# EAGLE board uduino (EAGLE 4.16)
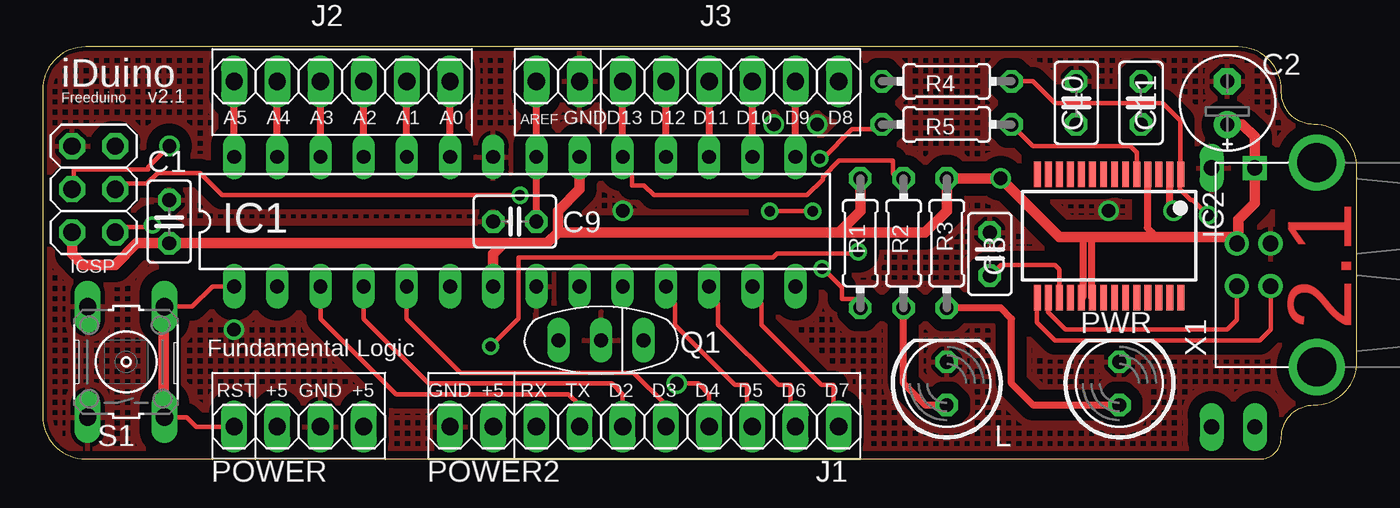
[diagram p0: board, top side]
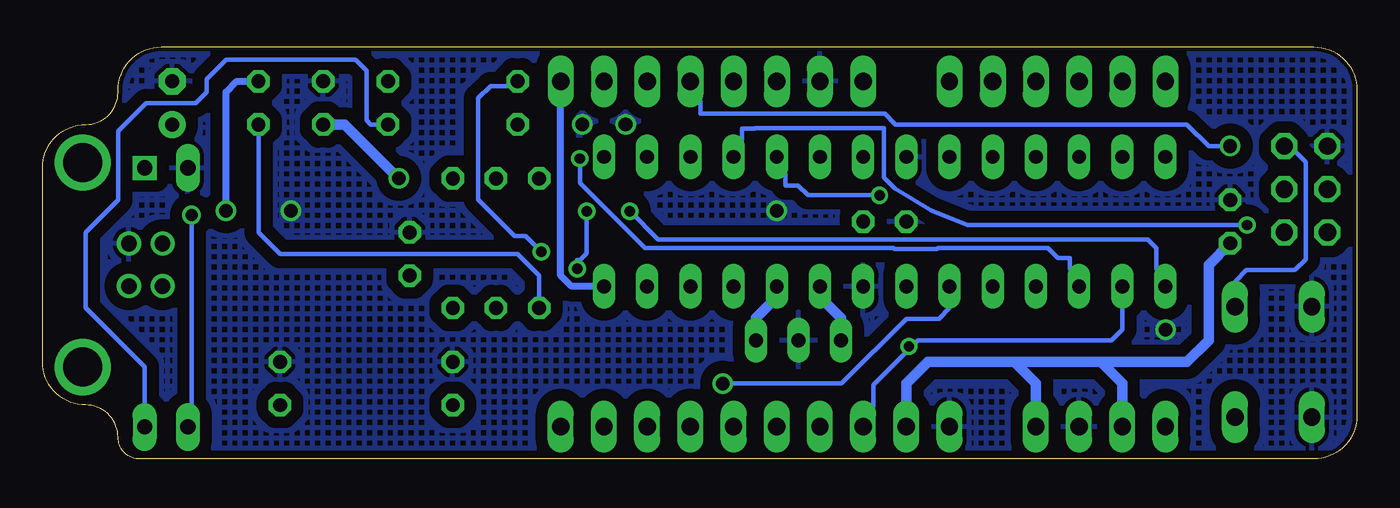
[diagram p1: board, bottom side, seen from below]

Size 77.3 x 24.25 mm. Coordinates in mm from the lower left corner, seen from the top.
Outline: 0,2.54 arc90 2.54,0 71.59,0 arc90 72.86,1.27 arc-90 74.77,3.17 arc90 77.3,5.71 77.3,17.14 arc90 74.77,19.68 arc-90 72.86,21.59 72.86,21.71 arc90 70.32,24.25 2.54,24.25 arc90 0,21.71 0,2.54
Copper layers (1*16): Top 0.035mm / dielectric 1.5mm / Bottom 0.035mm
Design rules "default": minimum track width 10mil, minimum drill 24mil, track to track 8mil, track to pad 8mil, pad to pad 8mil, via to via 8mil, smd to smd 8mil, copper to edge 10mil, drill to drill 10mil, minimum pad ring 10mil, minimum via ring 8mil, stop-mask expansion 4mil, vias tented up to drill 0mil, thermal gap 10mil
Net classes: 0 default: drill 0.203 mm; 1 power: width 0.61 mm, drill 0.203 mm, clearance 0.711 mm; 2 gnd: width 0.305 mm, drill 0.203 mm, clearance 0.711 mm; 3 usbvcc: width 0.406 mm, drill 0.203 mm, clearance 0.711 mm; 4 aref: width 0.406 mm, drill 0.203 mm

## Footprints (pad centres in the part's own frame; a part is rotated, then mirrored left to right if it is on the bottom)
C025-025X050 = drill 0.813 octagon: 1 -1.27,0; 2 1.27,0
E2,5-6E = drill 0.813 pad 1.575 round: + -1.27,0 | drill 0.813 pad 1.575 octagon: - 1.27,0
C025-030X050 = drill 0.813 octagon: 1 -1.27,0; 2 1.27,0
DIL28-3 = drill 0.813 long: 1 -16.51,-3.81; 2 -13.97,-3.81; 3 -11.43,-3.81; 4 -8.89,-3.81; 5 -6.35,-3.81; 6 -3.81,-3.81; 7 -1.27,-3.81; 8 1.27,-3.81; 9 3.81,-3.81; 10 6.35,-3.81; 11 8.89,-3.81; 12 11.43,-3.81; 13 13.97,-3.81; 14 16.51,-3.81; 15 16.51,3.81; 16 13.97,3.81; 17 11.43,3.81; 18 8.89,3.81; 19 6.35,3.81; 20 3.81,3.81; 21 1.27,3.81; 22 -1.27,3.81; 23 -3.81,3.81; 24 -6.35,3.81; 25 -8.89,3.81; 26 -11.43,3.81; 27 -13.97,3.81; 28 -16.51,3.81
SSOP28 = smd 0.4 x 1.5: 1 -4.225,-3.625; 2 -3.575,-3.625; 3 -2.925,-3.625; 4 -2.275,-3.625; 5 -1.625,-3.625; 6 -0.975,-3.625; 7 -0.325,-3.625; 8 0.325,-3.625; 9 0.975,-3.625; 10 1.625,-3.625; 11 2.275,-3.625; 12 2.925,-3.625; 13 3.575,-3.625; 14 4.225,-3.625; 15 4.225,3.625; 16 3.575,3.625; 17 2.925,3.625; 18 2.275,3.625; 19 1.625,3.625; 20 0.975,3.625; 21 0.325,3.625; 22 -0.325,3.625; 23 -0.975,3.625; 24 -1.625,3.625; 25 -2.275,3.625; 26 -2.925,3.625; 27 -3.575,3.625; 28 -4.225,3.625
DIP4-60 = drill 0.9 square: 1 -1.27,-7.62 | drill 0.9 long: 2 1.27,-7.62; 3 1.27,7.62; 4 -1.27,7.62
2X03 = drill 1.016 octagon: 1 -2.54,-1.27; 2 -2.54,1.27; 3 0,-1.27; 4 0,1.27; 5 2.54,-1.27; 6 2.54,1.27
1X08 = drill 1.016 long: 1 -8.89,0; 2 -6.35,0; 3 -3.81,0; 4 -1.27,0; 5 1.27,0; 6 3.81,0; 7 6.35,0; 8 8.89,0
1X06 = drill 1.016 long: 1 -6.35,0; 2 -3.81,0; 3 -1.27,0; 4 1.27,0; 5 3.81,0; 6 6.35,0
LED5MM = drill 0.813 octagon: A -1.27,0; K 1.27,0
1X04 = drill 1.016 long: 1 -3.81,0; 2 -1.27,0; 3 1.27,0; 4 3.81,0
1X02 = drill 1.016 long: 1 -1.27,0; 2 1.27,0
CSTLS_G9 = drill 0.813 long: 1 -2.5,0; 2 0,0; 3 2.5,0
0204/7 = drill 0.813 octagon: 1 -3.81,0; 2 3.81,0
B3F-10XX = drill 1.016 long: 1 -3.251,2.261; 2 3.251,2.261; 3 -3.251,-2.261; 4 3.251,-2.261
USB-B-H = drill 0.914 round: D+ 0,1.25; D- 1.981,1.25; GND 0,-1.25; VBUS 1.981,-1.25 | drill 2.286 round: P$1 -2.718,-6.02; P$2 -2.718,6.02

## Placement (x,y rotation side)
C1  100n  [C025-025X050]  7.46,13.96 90 top
C2  [E2,5-6E]  69.68,20.95 90 top
C8  100n  [C025-025X050]  55.72,12.06 270 top
C9  100n  [C025-030X050]  27.78,13.96 0 top
C10  100n  [C025-025X050]  60.8,20.95 90 top
C11  100n  [C025-025X050]  64.6,20.95 270 top
IC1  ATMEGA8  [DIL28-3]  27.78,13.96 0 top
IC2  FT232RL  [SSOP28]  62.73,13.12 180 top
IC3  FT232-INTEGRATED-1.0  [DIP4-60]  70.03,9.5 180 top
ICSP  ICSP  [2X03]  3.01,15.87 90 top
J1  [1X08]  37.94,1.9 0 top
J2  [1X06]  17.62,22.22 180 top
J3  [1X08]  37.94,22.22 180 top
L  [LED5MM]  53.18,4.44 90 top
POWER  [1X04]  15.08,1.9 0 top
POWER2  [1X02]  25.23,1.9 0 top
PWR  [LED5MM]  63.34,4.44 90 top
Q1  [CSTLS_G9]  32.86,6.98 180 top
R1  10k  [0204/7]  48.09,12.69 90 top
R2  1k  [0204/7]  50.63,12.69 90 top
R3  1k  [0204/7]  53.18,12.69 270 top
R4  1k  [0204/7]  53.18,22.22 0 top
R5  1k  [0204/7]  53.18,19.68 0 top
S1  [B3F-10XX]  4.92,5.71 90 top
X1  USB-B-H  [USB-B-H]  72.22,11.42 180 top

## Library data of the parts
C1 C2 C8-C11 R1-R5 = rcl
IC1 = atmel
IC2 = ftdichip
IC3 = spiffie-org
ICSP J1-J3 POWER POWER2 = pinhead
L PWR = led
Q1 = murata-resonators
S1 = switch-omron
X1 = con-usb

## Nets
+5V [usbvcc]: C1.1 C2.+ C10.1 IC1.7 IC1.20 IC2.4 IC2.19 IC2.20 IC3.1 ICSP.2 POWER2.2 POWER.2 POWER.4 R1.2 R3.1 X1.VBUS
AREF [aref]: C9.2 IC1.21 J3.8
D+: IC2.15 X1.D+
D-: IC2.16 X1.D-
GND [gnd]: C1.2 C2.- C8.1 C9.1 C10.2 IC1.8 IC1.22 IC2.7 IC2.18 IC2.21 IC2.25 IC2.26 IC3.2 ICSP.6 J3.7 L.K POWER2.1 POWER.3 PWR.K Q1.2 S1.1 S1.2 X1.GND
M8RXD: IC2.1 IC3.3 R4.2
M8TXD: IC2.5 IC3.4 R5.2
MISO: IC1.18 ICSP.1 J3.5
MOSI: IC1.17 ICSP.4 J3.4
N$2: L.A R2.1
N$3: PWR.A R3.2
N$4: IC1.10 Q1.1
N$5: IC1.14 J3.1
N$6: IC1.9 Q1.3
N$10: IC1.4 J1.3
N$11: IC1.5 J1.4
N$12: IC1.6 J1.5
N$13: IC1.11 J1.6
N$14: IC1.12 J1.7
N$15: IC1.13 J1.8
N$16: IC1.23 J2.1
N$17: IC1.24 J2.2
N$18: IC1.25 J2.3
N$19: IC1.26 J2.4
N$20: IC1.27 J2.5
N$21: IC1.28 J2.6
N$22: IC1.15 J3.2
N$24: C11.1 IC2.2
PD0: IC1.2 J1.1 R4.1
PD1: IC1.3 J1.2 R5.1
RESET: C11.2 IC1.1 ICSP.5 POWER.1 R1.1 S1.3 S1.4
SCK: IC1.19 ICSP.3 J3.6 R2.2
SS: IC1.16 J3.3
VCC33: C8.2 IC2.17

## Tracks (layer width: path | path; a pad name or v marks a point on that pad's centre or on a via)
+5V  (via drill 0.8)
  Top 0.406: 65.24,13.06 65.24,13.33 64.99,13.58 | IC2.20 61.68,9.5 61.68,13.06 | IC2.19 61.18,9.5 61.18,13.06 | 64.99,13.58 64.97,13.59 | IC2.4 65,13.6 64.99,13.58
  Top 0.61: IC1.20 31.59,15.87 30.32,14.6 30.32,13.33 | 30.32,13.33 29.68,12.69 27.14,12.69 | 27.14,12.69 26.51,12.06 IC1.7 | 46.83,13.33 51.91,13.33 53.18,14.6 R3.1 v56.35,16.51 59.8,13.06 61.18,13.06 61.68,13.06 65.24,13.06 70.19,13.06 70.19,12.69 | 30.32,13.33 46.83,13.33 | R1.2 48.09,14.6 46.83,13.33 | 27.14,12.69 C1.1 5.55,12.69 4.28,11.42 2.38,11.42 1.74,12.06 ICSP.2 | C2.+ 70.57,19.68 71.3,18.96 IC3.1 71.3,15.07 70.32,14.09 70.32,12.82 70.19,12.69 | 70.19,12.69 70.19,12.67 X1.VBUS 70.21,12.67 70.19,12.69
  Bottom 0.61: POWER2.2 26.51,4.44 25.23,5.71 20.16,5.71 | 20.16,5.71 18.89,4.44 POWER.4 | POWER.2 13.81,4.44 15.08,5.71 | 15.08,5.71 20.16,5.71 | 15.08,5.71 10,5.71 8.73,6.98 8.73,11.42 C1.1 | v56.35,16.51 59.52,19.68 C10.1
AREF
  Top 0.406: J3.8 IC1.21 C9.2
D+
  Top 0.254: 58.5,9.64 58.51,9.65 | 58.5,9.64 IC2.15 | 58.5,9.64 58.48,9.61 58.48,8.03 59.52,6.98 71.59,6.98 72.22,7.62 X1.D+
D-
  Top 0.254: 59.14,8.63 60.16,7.62 69.68,7.62 70.24,8.17 X1.D- | 59.14,8.63 59.12,8.65 | IC2.16 59.15,8.64 59.14,8.63
GND  (via drill 0.8)
  other vias: 62.7,14.6 34.12,14.6 45.55,19.68 43.02,19.68 11.27,7.62
  pour Bottom (hatched): -1.44,24.76 -1.44,0.63 78.57,0.63 78.57,24.76
  pour Top (hatched): 78.57,24.76 -1.44,24.76 -1.44,0.63 78.57,0.63
M8RXD  (via drill 0.7)
  Top 0.254: R4.2 58.26,22.22 59.52,20.95 65.88,20.95 66.92,19.9 66.92,16.79 66.89,16.76 | v68.54,14.35 67.65,15.23 67.53,15.23 66.89,15.87 66.89,16.76 | 66.92,16.92 66.89,16.89 66.89,16.76 | 66.89,16.76 66.9,16.75 IC2.1
  Bottom 0.254: IC3.3 68.78,1.5 68.8,1.52 68.54,1.77 v68.54,14.35
M8TXD
  Top 0.254: R5.2 58.26,18.41 63.97,18.41 64.32,18.05 64.35,18.05 IC2.5
  Bottom 0.254: IC3.4 71.3,5.42 74.77,8.88 74.77,13.33 72.86,15.23 72.86,19.3 71.21,20.95 68.29,20.95 67.65,21.59 67.65,22.35 66.51,23.49 58.89,23.49 58.26,22.86 58.26,19.93 58,19.68 R5.2
MISO  (via drill 0.61)
  Top 0.254: v6.46,13.76 6.46,13.66 4.38,13.66 ICSP.1
  Top 0.406: IC1.18 J3.5
  Bottom 0.254: v6.46,13.76 22.9,13.76 25.03,14.62 27.16,15.89 27.83,16.56 27.83,19.48 35.4,19.48 35.42,19.45 36.16,19.45 36.16,18.84 IC1.18
MOSI  (via drill 0.8)
  Top 0.254: ICSP.4 1.84,16.2 1.84,17.01 6.21,17.01 6.21,17.17 v7.46,18.41
  Top 0.406: J3.4 IC1.17
  Bottom 0.254: J3.4 38.59,21 38.59,20.32 27.78,20.32 27.14,19.68 10,19.68 8.73,18.41 v7.46,18.41
N$2
  Top 0.406: L.A 51.91,3.17 50.63,4.44 R2.1
N$3
  Top 0.406: R3.2 56.35,8.88 56.98,8.25 56.98,4.44 58.26,3.17 PWR.A
N$4
  Bottom 0.61: Q1.1 35.36,8.29 34.12,9.52 IC1.10
N$5
  Bottom 0.406: IC1.14 46.19,10.15 46.83,10.79 J3.1
N$6
  Bottom 0.61: Q1.3 30.36,8.29 31.59,9.52 IC1.9
N$10
  Top 0.254: IC1.4 18.89,8.25 22.7,4.44 33.49,4.44 34.12,3.81 J1.3
N$11
  Top 0.254: IC1.5 21.43,8.25 24.6,5.08 34.76,5.08 36.66,3.17 J1.4
N$12  (via drill 0.8)
  Top 0.254: v37.3,4.44 38.57,4.44 39.2,3.81 J1.5
  Bottom 0.254: IC1.6 23.96,8.88 24.6,8.25 26.51,8.25 30.32,4.44 v37.3,4.44
N$13
  Top 0.254: IC1.11 37.2,9.11 37.2,7.89 40.73,4.36 41.44,4.36 41.44,3.4 J1.6
N$14
  Top 0.254: IC1.12 39.74,9.11 39.74,7.89 43.27,4.36 43.98,4.36 43.98,3.4 J1.7
N$15
  Top 0.254: IC1.13 42.28,9.11 42.28,7.89 45.81,4.36 46.52,4.36 46.52,3.4 J1.8
N$16
  Top 0.406: IC1.23 J2.1
N$17
  Top 0.406: IC1.24 J2.2
N$18
  Top 0.406: IC1.25 J2.3
N$19
  Top 0.406: IC1.26 J2.4
N$20
  Top 0.406: IC1.27 J2.5
N$21
  Top 0.406: IC1.28 J2.6
N$22
  Top 0.406: IC1.15 J3.2
N$24  (via drill 0.8)
  Top 0.406: IC2.2 66.3,14.81 v66.51,14.6
  Bottom 0.406: v66.51,14.6 66.51,21.59 65.88,22.22 C11.1
PD0  (via drill 0.61)
  Top 0.254: v47.97,12.19 47.97,12.08 43.19,12.08 42.96,11.86 28,11.86 28,8.27 v26.35,6.62
  Bottom 0.254: 26.26,6.54 25.82,6.98 14.44,6.98 13.81,7.62 IC1.2 | 26.26,6.54 28.44,4.36 28.44,3.12 J1.1 | v47.97,12.19 48.91,13.13 49.54,13.13 51.68,15.26 51.68,21.23 50.97,21.94 50,21.94 R4.1 | 26.26,6.54 v26.35,6.62
PD1  (via drill 0.61)
  Top 0.254: IC1.3 16.35,8.25 20.79,3.81 30.95,3.81 31.59,3.17 J1.2 | v45.71,17.67 45.88,17.67 47.61,19.4 48.73,19.4 R5.1
  Bottom 0.254: v45.71,17.67 45.68,17.67 45.68,16.23 41.87,12.42 27.27,12.42 27.22,12.36 24.7,12.36 24.65,12.42 18.17,12.42 17.59,11.83 16.88,11.83 16.88,11.2 IC1.3
RESET  (via drill 0.61)
  Top 0.254: v42.76,14.57 v45.3,14.57 | v45.86,11.2 45.91,11.2 47.03,10.08 47.03,9.42 47.71,9.42 R1.1 | S1.4 8.8,8.96 10,10.15 IC1.1 | S1.3 8.48,2.46 9.04,1.9 POWER.1
  Top 0.61: S1.4 7.14,8.96 7.14,2.46 S1.3
  Bottom 0.254: C11.2 64.6,13.33 63.34,12.06 49.37,12.06 48.09,10.79 R1.1 | v42.76,14.57 41.11,12.92 12.31,12.92 11.8,12.42 11.8,11.2 IC1.1 | v45.3,14.57 45.3,12.08 45.68,11.7 45.86,11.7 v45.86,11.2 | ICSP.5 3.96,18.41 3.01,17.46 3.01,11.74 3.65,11.11 6.5,11.11 7.14,10.47 7.14,8.88 7.18,8.92 S1.4
SCK  (via drill 0.61)
  Top 0.254: R2.2 50,16.78 50,17.55 46.85,17.55 45.88,16.58 45.88,16.43 44.97,15.51 35.95,15.51 35.37,16.1 34.66,16.1 34.66,16.73 IC1.19 | v28.08,15.51 10.58,15.51 9.26,16.84 6.77,16.84 6.13,16.2 4.38,16.2 ICSP.3
  Top 0.406: IC1.19 J3.6
  Bottom 0.254: v28.08,15.51 32.3,15.51 32.88,16.1 33.62,16.1 33.62,16.71 IC1.19
SS
  Top 0.406: IC1.16 J3.3
VCC33
  Top 0.254: C8.2 56.35,11.42 59.52,11.42 59.8,11.15 IC2.17

## Text on the board
Top: 2.1
tPlace: iDuino | Freeduino | v2.1 | A5 | A4 | A3 | A2 | A1 | A0 | AREF | GND | D13 | D12 | D11 | D10 | D9 | D8 | Fundamental Logic | RST | +5 | GND | +5 | GND | +5 | RX | TX | D2 | D3 | D4 | D5 | D6 | D7
bRestrict: 2008-02-07 | FL